# EAGLE board Gesture (EAGLE 7.3.0)
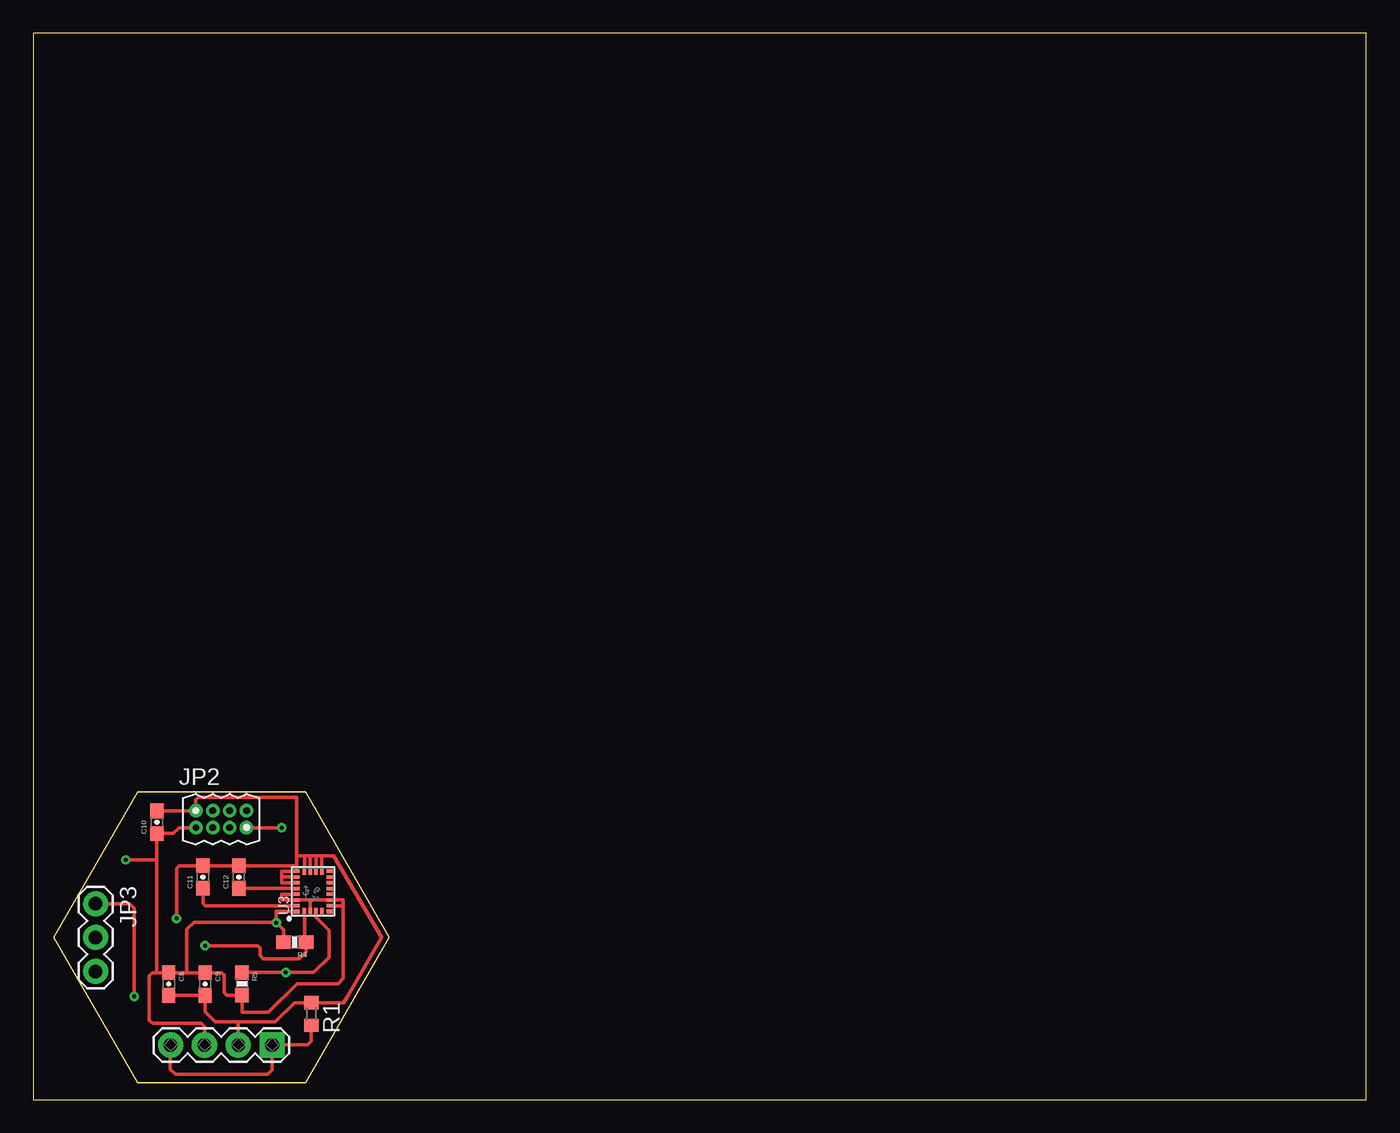
[diagram p0: board, top side]
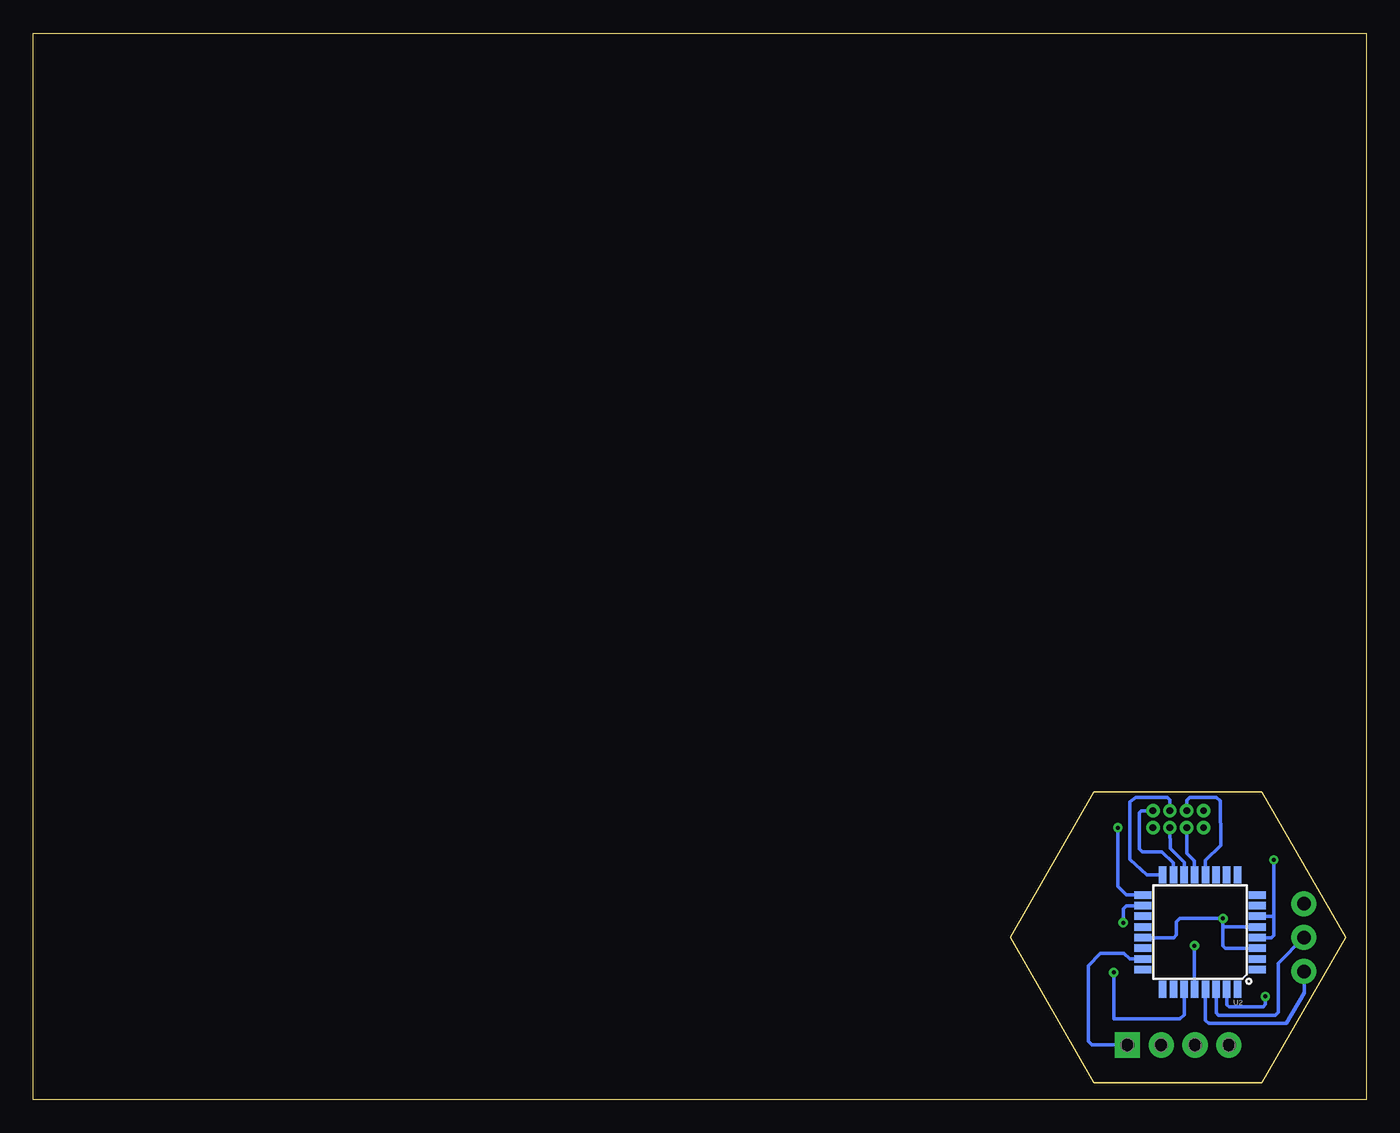
[diagram p1: board, bottom side, seen from below]

Size 100 x 80 mm. Coordinates in mm from the lower left corner, seen from the top.
Outline: 7.82,1.25 20.41,1.25 26.71,12.16 20.41,23.07
Outline: 7.82,1.26 1.52,12.17 7.82,23.07 20.41,23.07
Outline: 0,0 100,0 100,80 0,80 0,0
Copper layers (1*16): Top 0.035mm / dielectric 1.5mm / Bottom 0.035mm
Design rules "default *": minimum track width 10mil, minimum drill 24mil, track to track 8mil, track to pad 8mil, pad to pad 8mil, via to via 8mil, smd to smd 8mil, copper to edge 20mil, drill to drill 8mil, minimum pad ring 10mil, minimum via ring 8mil, stop-mask expansion 4mil, vias tented up to drill 0mil, thermal gap 10mil

## Footprints (pad centres in the part's own frame; a part is rotated, then mirrored left to right if it is on the bottom)
0603-CAP = smd 1.1 x 1: 1 -0.85,0; 2 0.85,0
1X04 = drill 1.016 pad 1.88 square: 1 0,0 | drill 1.016 pad 1.88: 2 2.54,0; 3 5.08,0; 4 7.62,0
M04X2_0.05" = drill 0.5 pad 0.813: 1 -3.81,0; 2 -3.81,1.27; 3 -2.54,0; 4 -2.54,1.27; 5 -1.27,0; 6 -1.27,1.27; 7 0,0; 8 0,1.27
1X03 = drill 1.016 pad 1.88: 1 0,0; 2 2.54,0; 3 5.08,0
R0603 = smd 1 x 1.1: 1 -0.85,0; 2 0.85,0
0603-RES = smd 1.1 x 1: 1 -0.85,0; 2 0.85,0
TQFP32-08 = smd 1.27 x 0.559: 1 -4.293,2.8; 2 -4.293,2; 3 -4.293,1.2; 4 -4.293,0.4; 5 -4.293,-0.4; 6 -4.293,-1.2; 7 -4.293,-2; 8 -4.293,-2.8; 17 4.293,-2.8; 18 4.293,-2; 19 4.293,-1.2; 20 4.293,-0.4; 21 4.293,0.4; 22 4.293,1.2; 23 4.293,2; 24 4.293,2.8 | smd 0.559 x 1.27: 9 -2.8,-4.293; 10 -2,-4.293; 11 -1.2,-4.293; 12 -0.4,-4.293; 13 0.4,-4.293; 14 1.2,-4.293; 15 2,-4.293; 16 2.8,-4.293; 25 2.8,4.293; 26 2,4.293; 27 1.2,4.293; 28 0.4,4.293; 29 -0.4,4.293; 30 -1.2,4.293; 31 -2,4.293; 32 -2.8,4.293
LGA24-8X4 = smd 0.27 x 0.45: 1 -1.505,1.225; 6 -1.505,-1.225; 7 -1.075,-1.225; 8 -0.645,-1.225; 9 -0.215,-1.225; 10 0.215,-1.225; 11 0.645,-1.225; 12 1.075,-1.225; 13 1.505,-1.225; 18 1.505,1.225; 19 1.075,1.225; 20 0.645,1.225; 21 0.215,1.225; 22 -0.215,1.225; 23 -0.645,1.225; 24 -1.075,1.225 | smd 0.45 x 0.27: 2 -1.475,0.645; 3 -1.475,0.215; 4 -1.475,-0.215; 5 -1.475,-0.645; 14 1.475,-0.645; 15 1.475,-0.215; 16 1.475,0.215; 17 1.475,0.645

## Placement (x,y rotation side)
C8  10uF  [0603-CAP]  10.16,8.67 270 top
C9  0.1uF  [0603-CAP]  12.89,8.67 270 top
C10  0.1uF  [0603-CAP]  9.27,20.8 90 top
C11  0.1uF  [0603-CAP]  12.73,16.7 90 top
C12  10nF  [0603-CAP]  15.42,16.69 90 top
JP1  [1X04]  17.92,4.09 180 top
JP2  [M04X2_0.05"]  16,20.4 0 top
JP3  [1X03]  4.67,14.69 270 top
R1  1M  [R0603]  20.85,6.41 270 top
R4  4.7K  [0603-RES]  19.62,11.81 180 top
R5  4.7K  [0603-RES]  15.66,8.69 270 top
U2  ATMEGA328P_TQFP  [TQFP32-08]  12.46,12.55 180 bottom
U3  LSM9DS1  [LGA24-8X4]  20.99,15.62 90 top

## Library data of the parts
C8 = SparkFun-Capacitors; PROD_ID: CAP-11015
C9-C11 = SparkFun-Capacitors; PROD_ID: CAP-00810
C12 = SparkFun-Capacitors; PROD_ID: CAP-00867
JP1 JP3 = SparkFun-Connectors
JP2 = MakerWear
R1 = adafruit
R4 R5 = SparkFun-Resistors; PROD_ID: RES-07857
U2 = SparkFun-DigitalIC; PROD_ID: IC-09069
U3 = SparkFun-Sensors; PROD_ID: IC-12536

## Nets
1X3SIN-SOUT: JP1.1 JP1.4 R1.2 U2.23
CE: JP2.3 U2.13
CSN: JP2.5 U2.14
GND: C8.2 C9.2 C10.2 C11.2 C12.2 JP1.2 JP2.2 R1.1 U2.3 U2.5 U2.21 U3.14 U3.15 U3.16 U3.17 U3.18 U3.19 U3.20
IRQ: JP2.4 U2.12
MISO: JP2.6 U2.16
MOSI: JP2.8 U2.15
N$8: C12.1 U3.21
N$10: C11.1 U3.24
RESET: JP3.3 U2.29
RX: JP3.2 U2.30
SCK: JP2.7 U2.17
SCL: R4.1 U2.28 U3.2
SDA: R5.1 U2.27 U3.4
TX: JP3.1 U2.31
VCC: C8.1 C9.1 C10.1 JP1.3 JP2.1 R4.2 R5.2 U2.4 U2.6 U2.18 U3.1 U3.3 U3.7 U3.8 U3.22 U3.23

## Tracks (layer width: path | path; a pad name or v marks a point on that pad's centre or on a via)
1X3SIN-SOUT
  Top 0.254: R1.2 20.85,4.37 20.57,4.09 JP1.1 17.92,2.25 17.56,1.89 10.67,1.89 10.27,2.29 10.27,4.06 JP1.4
  Bottom 0.254: U2.23 17.75,10.55 18.19,10.99 19.93,10.99 20.85,10.05 20.85,4.37 20.57,4.09 JP1.1
CE
  Bottom 0.254: JP2.3 13.46,18.48 12.89,17.91 12.89,16.39 U2.13
CSN
  Bottom 0.254: U2.14 13.65,17.81 14.69,18.85 JP2.5
GND  (via drill 0.3)
  Top 0.254: C10.2 12.18,21.65 JP2.2 12.19,22.49 12.38,22.68 19.75,22.68 19.75,18.29 | 19.75,17.54 19.75,17.15 U3.18 18.63,17.13 18.63,16.7 | 19.75,17.54 C12.2 12.72,17.54 C11.2 12.71,17.54 10.95,17.54 10.74,17.34 v10.74,13.59 | 21.64,18.29 22.52,18.29 26.12,12.15 23.57,7.73 23.29,7.26 R1.1 19.6,7.26 18.16,5.83 15.38,5.83 | 21.64,18.29 21.21,18.29 | 21.21,18.29 20.78,18.29 | 20.78,18.29 20.34,18.29 | 20.34,18.29 19.75,18.29 | 19.75,18.29 19.75,17.54 | C8.2 C9.2 12.9,7.81 12.9,6.58 13.65,5.83 15.38,5.83 | JP1.2 15.38,5.83 | U3.17 20.34,18.29 | U3.16 20.78,18.29 | U3.14 21.64,18.29 | U3.15 21.21,18.29 | 18.63,16.7 18.63,16.27 U3.20 | U3.19 18.63,16.7
  Bottom 0.254: U2.3 10.56,11.35 10.74,11.53 10.74,12.95 | 10.74,12.95 v10.74,13.59 13.99,13.59 14.24,13.35 14.24,12.34 14.43,12.15 U2.21 | U2.5 10.74,12.95
IRQ
  Bottom 0.254: JP2.4 13.46,22.45 13.23,22.68 11.23,22.68 10.94,22.39 10.91,19.07 12.06,17.93 U2.12
MISO
  Bottom 0.254: JP2.6 14.73,22.48 14.94,22.68 17.27,22.68 17.74,22.34 17.74,18.01 16.46,16.84 U2.16
MOSI
  Bottom 0.254: JP2.8 16.85,21.67 17.03,21.49 17.03,18.82 16.8,18.59 15.32,18.59 14.48,17.75 14.48,16.39 U2.15
N$8
  Top 0.254: U3.21 C12.1
N$10
  Top 0.254: U3.24 12.9,14.55 12.72,14.72 C11.1
RESET
  Bottom 0.254: U2.29 12.06,5.95 11.82,5.71 5.99,5.71 4.66,8.01 JP3.3
RX
  Bottom 0.254: U2.30 11.26,6.5 11.11,6.34 6.82,6.34 6.6,6.55 6.6,10.22 JP3.2
SCK  (via drill 0.3)
  Top 0.254: JP2.7 v18.63,20.4
  Bottom 0.254: U2.17 17.98,15.35 18.63,16 v18.63,20.4
SCL  (via drill 0.3)
  Top 0.254: U3.2 20.35,12.01 R4.1 20.47,11.09 19.95,10.57 17.26,10.57 17,10.82 17,11.38 16.84,11.54 v12.89,11.54
  Bottom 0.254: v12.89,11.54 12.89,7.8 U2.28
SDA  (via drill 0.3)
  Top 0.254: R5.1 v18.94,9.54 21.04,9.54 22.19,10.68 22.19,12.69 21.21,13.67 U3.4
  Bottom 0.254: v18.94,9.54 18.94,6.04 13.97,6.04 13.66,6.34 U2.27
TX  (via drill 0.3)
  Top 0.254: JP3.1 7.21,14.69 7.57,14.34 v7.57,7.73
  Bottom 0.254: v7.57,7.73 7.57,7.15 7.71,6.97 10.27,6.97 10.45,7.11 10.45,7.83 U2.31
VCC  (via drill 0.3)
  Top 0.254: JP2.1 12.18,20.38 10.94,20.38 10.5,19.95 C10.1 9.27,17.96 | 20.78,14.98 U3.23 18.63,14.98 18.63,15.41 U3.22 | 20.78,14.98 U3.8 23.25,14.97 23.25,14.54 | U3.3 20.78,14.98 | U3.1 18.24,14.12 18.22,14.1 v18.22,13.27 | 11.52,9.52 C8.1 9.27,9.52 | 11.52,9.52 C9.1 14.14,9.52 14.31,9.35 14.31,8.03 14.5,7.84 R5.2 15.66,6.53 17.61,6.53 19.79,8.7 22.86,8.7 23.25,9.09 23.25,14.54 | 9.27,17.96 9.27,9.52 | JP1.3 12.84,5.46 12.59,5.71 8.95,5.7 8.71,5.94 8.71,9.3 8.94,9.53 9.27,9.53 9.27,9.52 | U3.7 23.25,14.54 | 9.27,17.96 9.25,17.98 v6.93,17.98 | 11.52,9.52 11.52,12.75 12.06,13.3 18.2,13.3 v18.22,13.27 | R4.2 18.77,12.72 v18.22,13.27
  Bottom 0.254: v18.22,13.27 18.22,14.3 17.98,14.55 U2.18 | 12.14,20.45 JP2.1 | U2.4 7.11,12.15 6.93,12.32 6.93,13.75 | 6.93,13.75 v6.93,17.98 | U2.6 6.93,13.75